# Altium PCB PCB1.PcbDoc
Units mil, origin at the board's own origin, x right, y up, seen from the top; angles counter-clockwise.
Board outline 6702.94 x 3280.03 mil, 2 copper layers (Top Layer, Bottom Layer); 83 components, 130 nets, 342 pads, 0 vias.
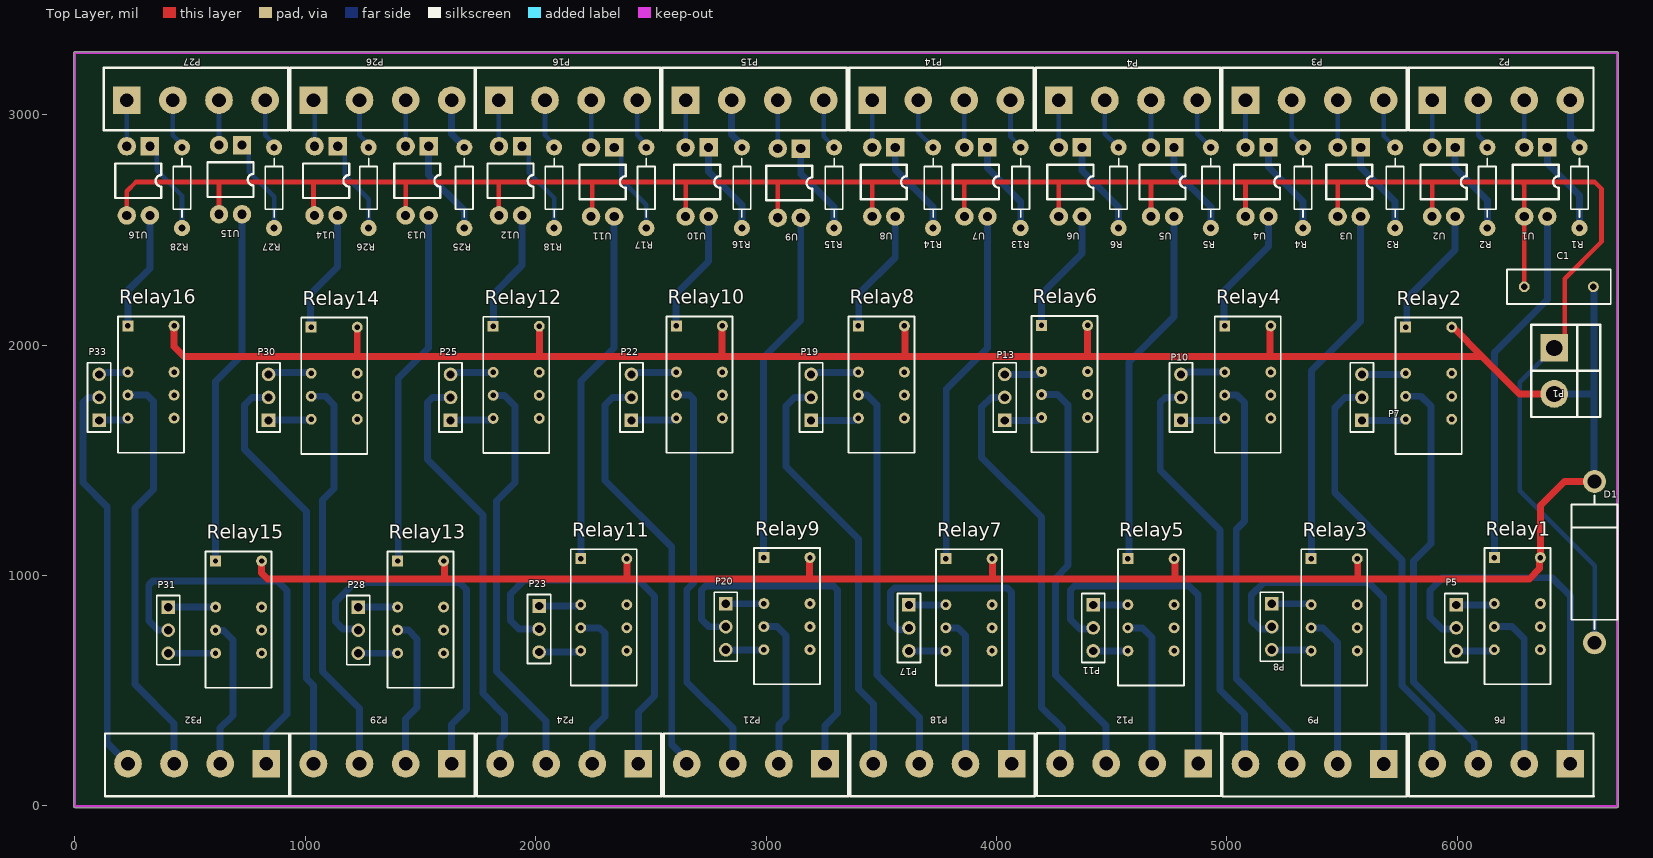
[diagram p0: Top Layer view]
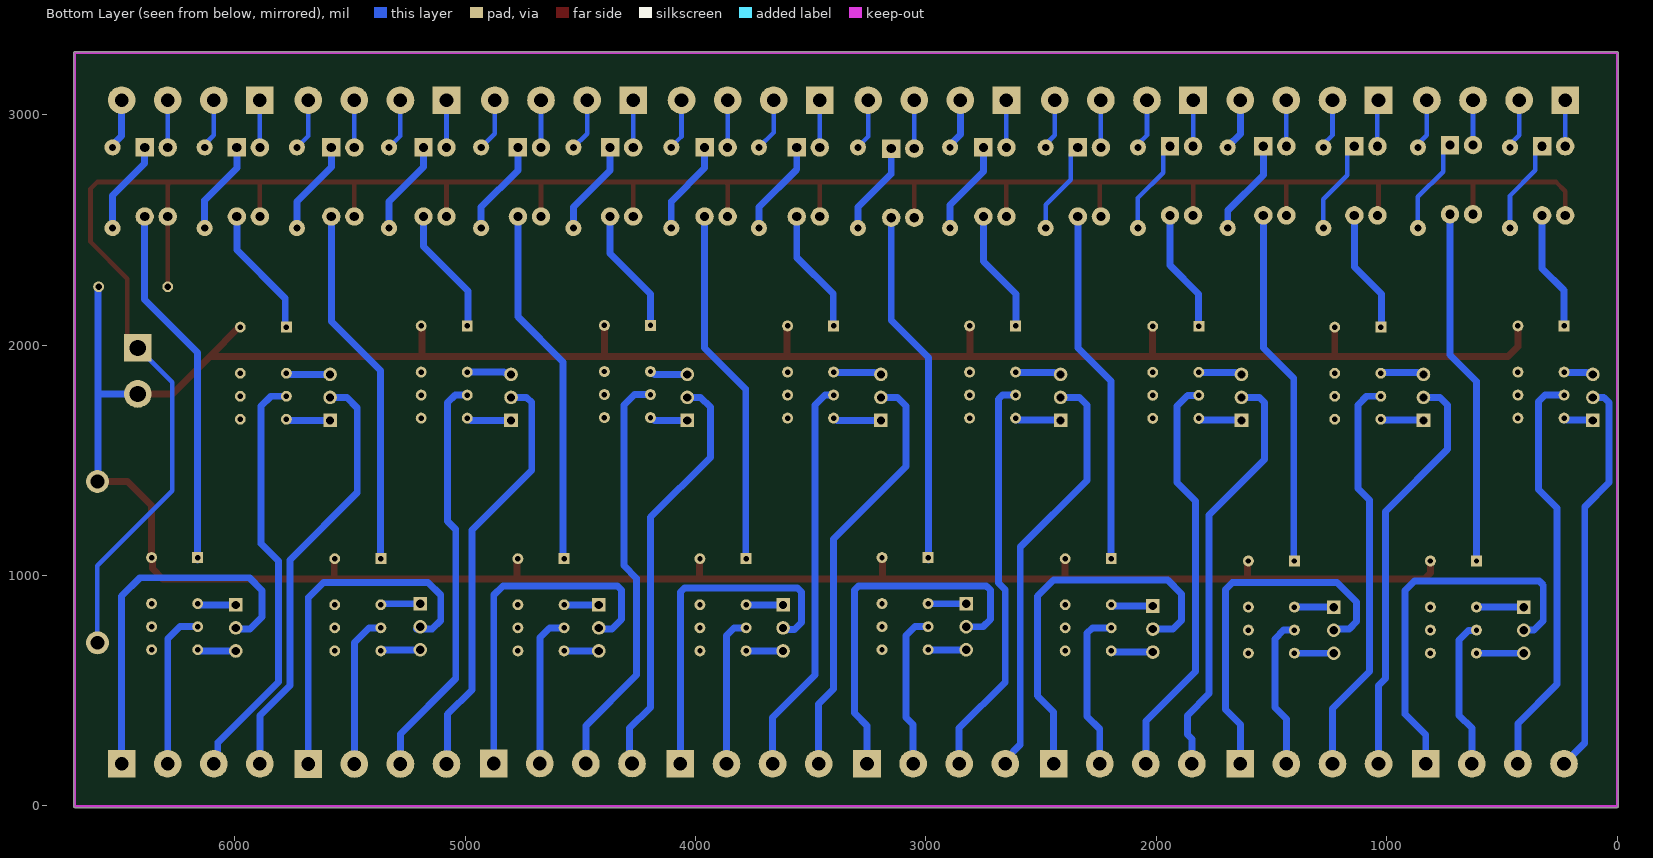
[diagram p1: Bottom Layer view, seen from below]

## Layer stack, top to bottom
Top Solder: solder mask 0.4, Solder Resist, Dk 3.5
Top Layer: signal copper 1.4
Dielectric 1: dielectric 12.6, FR-4, Dk 4.8
Bottom Layer: signal copper 1.4
Bottom Solder: solder mask 0.4, Solder Resist, Dk 3.5

## Board outline
-4.88,-1.14 cw(c0,0) -5.02,0 -5.02,3267.72 cw(c0,3267.72) 0,3272.73 6692.91,3272.73 cw(c6692.91,3267.72) 6697.93,3267.72 6697.93,0 cw(c6692.91,0) 6697.8,-1.14 cw(c6692.91,-2.28) 6697.93,-2.28 cw(c6692.91,-2.28) 6692.91,-7.3 0,-7.3 cw(c0,-2.28)

## Design rules (kind name [scope] priority, off if disabled: settings)
Clearance [All] p1: gap=15 ignorepadtopadclearanceinfootprint=FALSE
PolygonConnect [All] p1: connectstyle=Relief reliefconductorwidth=10 reliefentries=4 polygonreliefangle="90 Angle" airgapwidth=10
RoutingVias [All] p1: holewidth=28 width=50 viastyle="Through Hole" minholewidth=28 minwidth=50 maxholewidth=28 maxwidth=50
SolderMaskExpansion [All] p1: expansion=4 istentingtop=FALSE
Width [All] p1: maxlimit=50 minlimit=10 preferedwidth=20
30 further rules are at their usual default settings.

## Components (designator, comment, footprint, x,y, rotation, side; value= is the part's Value field where it differs from the comment)
C1 "Cap" RAD-0.3 6440.2,2252.72 r0 top value=100pF
D1 "D Zener" DIODE-0.7 6595.2,1057.72 r90 top
P1 "Header 2" CON2 6420.2,1987.72 r270 top
P2 "Header 4" CON4 5890.2,3062.72 r0 top
P3 "Header 4" CON4 5080.2,3062.72 r0 top
P4 "Header 4" CON4 4270.2,3062.72 r0 top
P5 "MHDR1X3" HDR1X3 5994.8,872.28 r270 top
P6 "Header 4" CON4 6490.2,182.72 r180 top
P7 "MHDR1X3" HDR1X3 5585.2,1672.72 r90 top
P8 "MHDR1X3" HDR1X3 5194.17,877.28 r270 top
P9 "Header 4" CON4 5680.2,181.72 r180 top
P10 "MHDR1X3" HDR1X3 4800.2,1672.72 r90 top
P11 "MHDR1X3" HDR1X3 4419.3,872.28 r270 top
P12 "Header 4" CON4 4875.2,183.72 r180 top
P13 "MHDR1X3" HDR1X3 4035.2,1672.72 r90 top
P14 "Header 4" CON4 3460.2,3062.72 r0 top
P15 "Header 4" CON4 2650.2,3062.72 r0 top
P16 "Header 4" CON4 1840.2,3062.72 r0 top
P17 "MHDR1X3" HDR1X3 3619.3,872.28 r270 top
P18 "Header 4" CON4 4065.2,182.72 r180 top
P19 "MHDR1X3" HDR1X3 3195.2,1672.72 r90 top
P20 "MHDR1X3" HDR1X3 2824.8,877.28 r270 top
P21 "Header 4" CON4 3255.2,182.72 r180 top
P22 "MHDR1X3" HDR1X3 2415.2,1672.72 r90 top
P23 "MHDR1X3" HDR1X3 2014.8,867.28 r270 top
P24 "Header 4" CON4 2445.2,182.72 r180 top
P25 "MHDR1X3" HDR1X3 1630.2,1672.72 r90 top
P26 "Header 4" CON4 1035.2,3062.72 r0 top
P27 "Header 4" CON4 225.2,3062.72 r0 top
P28 "MHDR1X3" HDR1X3 1229.8,862.28 r270 top
P29 "Header 4" CON4 1635.2,182.72 r180 top
P30 "MHDR1X3" HDR1X3 840.2,1672.72 r90 top
P31 "MHDR1X3" HDR1X3 404.8,862.28 r270 top
P32 "Header 4" CON4 830.2,182.72 r180 top
P33 "MHDR1X3" HDR1X3 105.2,1672.72 r90 top
R1 "Res3" R1/4W 6529.71,2857.72 r270 top value=1K
R2 "Res3" R1/4W 6129.71,2857.72 r270 top value=1K
R3 "Res3" R1/4W 5729.71,2857.72 r270 top value=1K
R4 "Res3" R1/4W 5329.71,2857.72 r270 top value=1K
R5 "Res3" R1/4W 4929.71,2857.72 r270 top value=1K
R6 "Res3" R1/4W 4529.71,2857.72 r270 top value=1K
R13 "Res3" R1/4W 4104.71,2857.72 r270 top value=1K
R14 "Res3" R1/4W 3724.71,2857.72 r270 top value=1K
R15 "Res3" R1/4W 3294.71,2857.72 r270 top value=1K
R16 "Res3" R1/4W 2894.71,2857.72 r270 top value=1K
R17 "Res3" R1/4W 2479.71,2857.72 r270 top value=1K
R18 "Res3" R1/4W 2079.71,2857.72 r270 top value=1K
R25 "Res3" R1/4W 1689.71,2857.72 r270 top value=1K
R26 "Res3" R1/4W 1274.71,2857.72 r270 top value=1K
R27 "Res3" R1/4W 864.71,2857.72 r270 top value=1K
R28 "Res3" R1/4W 464.71,2857.72 r270 top value=1K
Relay1 "G6S-2" G6S-2 6160.2,1077.72 r0 top
Relay2 "G6S-2" G6S-2 5775.2,2077.72 r0 top
Relay3 "G6S-2" G6S-2 5365.2,1072.72 r0 top
Relay4 "G6S-2" G6S-2 4990.2,2082.72 r0 top
Relay5 "G6S-2" G6S-2 4570.2,1072.72 r0 top
Relay6 "G6S-2" G6S-2 4195,2085 r0 top
Relay7 "G6S-2" G6S-2 3780.2,1072.72 r0 top
Relay8 "G6S-2" G6S-2 3400.2,2082.72 r0 top
Relay9 "G6S-2" G6S-2 2990.2,1077.72 r0 top
Relay10 "G6S-2" G6S-2 2610.2,2082.72 r0 top
Relay11 "G6S-2" G6S-2 2195.2,1072.72 r0 top
Relay12 "G6S-2" G6S-2 1815.2,2081.65 r0 top
Relay13 "G6S-2" G6S-2 1400.2,1062.72 r0 top
Relay14 "G6S-2" G6S-2 1025.2,2077.72 r0 top
Relay15 "G6S-2" G6S-2 610.2,1062.72 r0 top
Relay16 "G6S-2" G6S-2 230.2,2082.72 r0 top
U1 "OPTO" DIP4 6390.2,2857.72 r270 top value=PC817
U2 "OPTO" DIP4 5990.2,2857.72 r270 top value=PC817
U3 "OPTO" DIP4 5580.2,2857.72 r270 top value=PC817
U4 "OPTO" DIP4 5180.2,2857.72 r270 top value=PC817
U5 "OPTO" DIP4 4770.2,2857.72 r270 top value=PC817
U6 "OPTO" DIP4 4370.2,2857.72 r270 top value=PC817
U7 "OPTO" DIP4 3960.2,2857.72 r270 top value=PC817
U8 "OPTO" DIP4 3560.2,2857.72 r270 top value=PC817
U9 "OPTO" DIP4 3150.2,2852.72 r270 top value=PC817
U10 "OPTO" DIP4 2750.2,2857.72 r270 top value=PC817
U11 "OPTO" DIP4 2340.2,2857.72 r270 top value=PC817
U12 "OPTO" DIP4 1940.2,2862.72 r270 top value=PC817
U13 "OPTO" DIP4 1535.2,2862.72 r270 top value=PC817
U14 "OPTO" DIP4 1140.2,2862.72 r270 top value=PC817
U15 "OPTO" DIP4 725.2,2867.72 r270 top value=PC817
U16 "OPTO" DIP4 325.2,2862.72 r270 top value=PC817

## Footprints (in the part's own frame and the unit in brackets; to place one, negate y for a bottom-side part, rotate by r counter-clockwise, add the part's x,y. Pads: shape width x height; smd on the part's side, far side on the other; paste and mask are expansions set on the pad)
CON2 [mil]
  rect 120x120 hole 70: 1(0,0)
  round 120 hole 70: 2(200,0)
  silkscreen extent -100,-100 300,200
CON4 [mil] "CON4 5.08"
  rect 120x120 hole 59.06: 1(0,0)
  round 120 hole 59.06: 2(200,0) 3(400,0) 4(600,0)
  silkscreen extent -101,-131 700,141
DIODE-0.7 [mil] "Diode, Thru-Hole; 2 Leads; 0.7 in Pin Spacing"
  round 100 hole 60: 1(-350,0) 2(350,0)
  silkscreen extent -290,-100 290,100
DIP4 [mil]
  rect 80x80 hole 40: 1(0,0)
  round 80 hole 40: 2(0,-100) 3(300,-100) 4(300,0)
  silkscreen extent 75,-150 225,50
G6S-2 [mm]
  rect 1.2x1.2 hole 0.6: 1(0,0)
  round 1.2 hole 0.6: 2(0,-5.08) 3(0,-7.62) 4(0,-10.16) 5(5.08,-10.16) 6(5.08,-7.62) 7(5.08,-5.08) 8(5.08,0)
  silkscreen extent -1.1,-13.97 6.18,1.05, body extent -1.02,-13.97 6.73,1.02, height 8.55
HDR1X3 [mm] "Connector; Header; 3 Position"
  rect 1.5x1.5 hole 0.9: 1(0,0)
  round 1.5 hole 0.9: 2(2.54,0) 3(5.08,0)
  silkscreen extent -1.27,-1.27 6.35,1.27
R1/4W [mil] "R 1/4W, 2 Pin, 350mil"
  round 70 hole 31: 1(0,0) 2(350,0)
  silkscreen extent 48,-38 302,38, body extent -40,-47 386,47, height 111
RAD-0.3 [mm] "Radial Cap, Thru-Hole; 2 Leads; 0.3 in Pin Spacing"
  round 1.2 hole 0.7: 1(-3.81,0) 2(3.81,0)
  silkscreen extent -5.71,-1.91 5.71,1.91

## Part data
C1: "Capacitor", LatestRevisionDate=17-Jul-2002, LatestRevisionNote="Re-released for DXP Platform.", PackageDescription="Radial Cap, Thru-Hole; 2 Leads; 0.3 in Pin Spacing", PackageReference=RAD-0.3, Published=8-Jun-2000, Publisher="Altium Limited"
D1: "Zener Diode", LatestRevisionDate=17-Jul-2002, LatestRevisionNote="Re-released for DXP Platform.", PackageDescription="Diode, Thru-Hole; 2 Leads; 0.7 in Pin Spacing", PackageReference=DIODE-0.7, Published=8-Jun-2000, Publisher="Altium Limited"
P1: "Header, 2-Pin", LatestRevisionDate=17-Jul-2002, LatestRevisionNote="Re-released for DXP Platform.", Publisher="Altium Limited"
P2 P3 P4 P6 P9 P12 P14 P15 P16 P18 P21 P24 P26 P27 P29 P32: "Header, 4-Pin", LatestRevisionDate=17-Jul-2002, LatestRevisionNote="Re-released for DXP Platform.", Publisher="Altium Limited"
P5 P7 P8 P10 P11 P13 P17 P19 P20 P22 P23 P25 P28 P30 P31 P33: "Header, 3-Pin", LatestRevisionDate=17-Jul-2002, LatestRevisionNote="Re-released for DXP Platform.", Publisher="Altium Limited"
R1 R2 R3 R4 R5 R6 R13 R14 R15 R16 R17 R18 R25 R26 R27 R28: "Resistor", LatestRevisionDate=29-May-2009, LatestRevisionNote="IPC-7351 Footprint Added.", PackageDescription="Chip Resistor", PackageReference=J1-0603, Published=8-Jun-2000, Publisher="Altium Limited"
U1 U2 U3 U4 U5 U6 U7 U8 U9 U10 U11 U12 U13 U14 U15 U16: library part OPTO_PC817

## Nets (pads, with @x,y where several pads share a name; then routed paths per layer and width w, separated by ;. In a path a pad name is that pad's centre, name@x,y a point inside that pad or via, vN(x,y) a via of type N, cw(c..) or ccw(c..) an arc to the next point about the centre after c; other vN are vias at no path point)
GND: C1.1 D1.1 P1.1 U1.3 U2.3 U3.3 U4.3 U5.3 U6.3 U7.3 U8.3 U9.3 U10.3 U11.3 U12.3 U13.3 U14.3 U15.3 U16.3 | length 11340
  Top Layer w20: U16.3 225.2,2667.72 265.2,2707.72 625.2,2707.72 ; U15.3 625.2,2707.72 ; U14.3 1035.2,2567.72 1035.2,2707.72 ; U13.3 1435.2,2707.72 ; U12.3 1840.2,2707.72 ; U11.3 2245.2,2562.72 2245.2,2707.72 ; U10.3 2650.2,2707.72 ; U9.3 3050.2,2702.72 3055.2,2707.72 ; U8.3 3460.2,2707.72 ; U7.3 3860.2,2697.72 3870.2,2707.72 ; U6.3 4270.2,2702.72 4275.2,2707.72 ; U5.3 4670.2,2707.72 ; U4.3 5080.2,2707.72 ; U3.3 5480.2,2707.72 ; U2.3 5890.2,2702.72 5895.2,2707.72 ; C1.1 U1.3 6290.2,2696 6278.48,2707.72 ; P1.1 6465.2,2032.72 6465.2,2287.72 6625.2,2447.72 6625.2,2677.72 6595.2,2707.72 6278.48,2707.72 ; 625.2,2707.72 1035.2,2707.72 ; 1035.2,2707.72 1435.2,2707.72 ; 1435.2,2707.72 1840.2,2707.72 ; 1840.2,2707.72 2245.2,2707.72 ; 2245.2,2707.72 2650.2,2707.72 ; 2650.2,2707.72 3055.2,2707.72 ; 3055.2,2707.72 3460.2,2707.72 ; 3460.2,2707.72 3870.2,2707.72 ; 3870.2,2707.72 4275.2,2707.72 ; 4275.2,2707.72 4670.2,2707.72 ; 4670.2,2707.72 5080.2,2707.72 ; 5080.2,2707.72 5480.2,2707.72 ; 5480.2,2707.72 5895.2,2707.72 ; 5895.2,2707.72 6278.48,2707.72
  Bottom Layer w20: P1.1 6270.2,1837.72 6270.2,1367.72 6595.2,1042.72 D1.1
NetP2_1: P2.1 U2.2 | length 205
  Bottom Layer w20: U2.2 P2.1
NetP2_2: P2.2 R2.1 | length 221.4
  Bottom Layer w20: P2.2 6090.2,2910.13 6129.71,2870.62 R2.1
NetP2_3: P2.3 U1.2 | length 205
  Bottom Layer w20: U1.2 P2.3
NetP2_4: P2.4 R1.1 | length 221.4
  Bottom Layer w30: P2.4 6490.2,2908.05 6529.71,2868.54 R1.1
NetP3_1: P3.1 U4.2 | length 205
  Bottom Layer w20: U4.2 P3.1
NetP3_2: P3.2 R4.1 | length 225.5
  Bottom Layer w20: P3.2 5280.2,2907.23 R4.1
NetP3_3: P3.3 U3.2 | length 205
  Bottom Layer w20: U3.2 P3.3
NetP3_4: P3.4 R3.1 | length 225.5
  Bottom Layer w20: P3.4 5680.2,2907.23 R3.1
NetP4_1: P4.1 U6.2 | length 205
  Bottom Layer w20: U6.2 P4.1
NetP4_2: P4.2 R6.1 | length 229.7
  Bottom Layer w20: P4.2 4470.2,2917.23 R6.1
NetP4_3: P4.3 U5.2 | length 205
  Bottom Layer w20: U5.2 P4.3
NetP4_4: P4.4 R5.1 | length 229.7
  Bottom Layer w20: P4.4 4870.2,2917.23 R5.1
NetP5_1: P5.1 Relay1.2 | length 167.6
  Bottom Layer w30: P5.1 6150.1,872.28 6155.53,877.72 Relay1.2
NetP5_2: P5.2 P6.1 | length 1650
  Bottom Layer w30: P5.2@6000.2,767.72 5932.28,767.72 5880.2,819.8 5880.2,935.2 5935,990 6410,990 6490.2,909.8 P6.1
NetP5_3: P5.3 Relay1.4 | length 167.6
  Bottom Layer w30: P5.3 6150.1,672.28 6155.53,677.72 Relay1.4
NetP6_2: P6.2 Relay1.3 | length 694
  Bottom Layer w30: Relay1.3 6237.28,777.72 6290.2,724.8 P6.2
NetP6_3: P6.3 Relay2.3 | length 1826.9
  Bottom Layer w30: Relay2.3 5842.28,1777.72 5885.2,1734.8 5885.2,1137.72 5810.2,1062.72 5810.2,537.72 6072.98,274.94 6072.98,199.94 P6.3
NetP6_4: P6.4 P7.2 | length 1856.2
  Bottom Layer w30: P7.2 5512.72,1772.72 5467.62,1727.62 5467.62,1360.29 5760.2,1067.72 5760.2,522.72 5890.2,392.72 P6.4
NetP7_1: P7.1 Relay2.4 | length 187.4
  Bottom Layer w30: P7.1 5765.53,1672.72 Relay2.4@5770.53,1677.72
NetP7_3: P7.3 Relay2.2 | length 187.4
  Bottom Layer w30: P7.3 5765.53,1872.72 Relay2.2@5770.53,1877.72
NetP8_1: P8.1 Relay3.2 | length 172.9
  Bottom Layer w30: P8.1 5355.96,877.28 5360.53,872.72 Relay3.2
NetP8_2: P8.2 P9.1 | length 1579.2
  Bottom Layer w30: P8.2@5210.83,767.72 5142.28,767.72 5105.2,804.8 5105.2,915.2 5160,970 5615,970 5680.2,904.8 P9.1
NetP8_3: P8.3 Relay3.4 | length 172.9
  Bottom Layer w30: P8.3 5355.96,677.28 5360.53,672.72 Relay3.4
NetP9_2: P9.2 Relay3.3 | length 669.1
  Bottom Layer w30: Relay3.3 5417.28,772.72 5480.2,709.8 P9.2
NetP9_3: P9.3 Relay4.3 | length 1780.6
  Bottom Layer w30: Relay4.3 5042.28,1782.72 5075.2,1749.8 5075.2,1235.2 5040.2,1200.2 5040.2,552.72 5280.2,312.72 P9.3
NetP9_4: P9.4 P10.2 | length 1821.1
  Bottom Layer w30: P10.2 4732.72,1772.72 4710.2,1750.2 4710.2,1457.72 4970.2,1197.72 4970.2,502.72 5075.2,397.72 5075.2,186.72 P9.4
NetP10_1: P10.1 Relay4.4 | length 189.5
  Bottom Layer w30: P10.1 4975.53,1672.72 Relay4.4@4985.53,1682.72
NetP10_3: P10.3 Relay4.2 | length 194.1
  Bottom Layer w30: P10.3 4805.76,1878.28 4826.3,1878.28 4830.74,1882.72 Relay4.2
NetP11_1: P11.1 Relay5.2 | length 151.1
  Bottom Layer w30: P11.1 4569.76,872.28 Relay5.2
NetP11_2: P11.2 P12.1 | length 1560.6
  Bottom Layer w30: P11.2@4425.7,767.72 4362.28,767.72 4320.2,809.8 4320.2,937.43 4337.77,955 4835,955 4875.2,914.8 P12.1
NetP11_3: P11.3 Relay5.4 | length 151.1
  Bottom Layer w30: P11.3 4569.76,672.28 Relay5.4
NetP12_2: P12.2 Relay5.3 | length 668.9
  Bottom Layer w30: Relay5.3 4632.28,772.72 4675.2,729.8 P12.2
NetP12_3: P12.3 Relay6.3 | length 1803.9
  Bottom Layer w30: Relay6.3 4265,1785 4310.2,1739.8 4310.2,1042.72 4255.2,987.72 4255.2,567.72 4475.2,347.72 P12.3
NetP12_4: P12.4 P13.2 | length 1813.2
  Bottom Layer w30: P13.2 3977.72,1772.72 3935.2,1730.2 3935.2,1512.72 4195.2,1252.72 4195.2,427.72 4285.2,337.72 4285.2,193.72 P12.4
NetP13_1: P13.1 Relay6.4 | length 160.2
  Bottom Layer w30: P13.1 4178.05,1672.72 Relay6.4@4190.33,1685
NetP13_3: P13.3 Relay6.2 | length 160.2
  Bottom Layer w30: P13.3 4178.05,1872.72 Relay6.2@4190.33,1885
NetP14_1: P14.1 U8.2 | length 205
  Bottom Layer w20: U8.2 P14.1
NetP14_2: P14.2 R14.1 | length 231.7
  Bottom Layer w20: P14.2 3660.2,2922.23 R14.1
NetP14_3: P14.3 U7.2 | length 205
  Bottom Layer w20: U7.2 P14.3
NetP14_4: P14.4 R13.1 | length 223.4
  Bottom Layer w20: P14.4 4060.2,2905.13 4104.71,2860.62 R13.1
NetP15_1: P15.1 U10.2 | length 205
  Bottom Layer w20: U10.2 P15.1
NetP15_2: P15.2 R16.1 | length 223.4
  Bottom Layer w30: P15.2 2850.2,2913.05 2894.71,2868.54 R16.1
NetP15_3: P15.3 U9.2 | length 210
  Bottom Layer w20: U9.2 P15.3
NetP15_4: P15.4 R15.1 | length 223.4
  Bottom Layer w20: P15.4 3250.2,2905.13 3294.71,2860.62 R15.1
NetP16_1: P16.1 U12.2 | length 200
  Bottom Layer w20: U12.2 P16.1
NetP16_2: P16.2 R18.1 | length 221.4
  Bottom Layer w20: P16.2 2040.2,2910.13 2079.71,2870.62 R18.1
NetP16_3: P16.3 U11.2 | length 205
  Bottom Layer w20: U11.2 P16.3
NetP16_4: P16.4 R17.1 | length 221.4
  Bottom Layer w20: P16.4 2440.2,2910.13 2479.71,2870.62 R17.1
NetP17_1: P17.1 Relay7.2 | length 161.1
  Bottom Layer w30: P17.1 3779.76,872.28 Relay7.2
NetP17_2: P17.2 P18.1 | length 1515.7
  Bottom Layer w30: P17.2@3625.7,767.72 3622.98,765 3570.2,765 3540.2,795 3540.2,927.43 3557.77,945 4047.62,945 4065.2,927.43 P18.1
NetP17_3: P17.3 Relay7.4 | length 161.1
  Bottom Layer w30: P17.3 3779.76,672.28 Relay7.4
NetP18_2: P18.2 Relay7.3 | length 655.7
  Bottom Layer w30: Relay7.3 3832.28,772.72 3865.2,739.8 P18.2
NetP18_3: P18.3 Relay8.3 | length 1731.5
  Bottom Layer w30: Relay8.3 3437.28,1782.72 3480.2,1739.8 3480.2,567.72 3665.2,382.72 P18.3
NetP18_4: P18.4 P19.2 | length 1835.4
  Bottom Layer w30: P19.2 3122.72,1772.72 3085.2,1735.2 3085.2,1472.72 3400.2,1157.72 3400.2,507.72 3465.2,442.72 P18.4
NetP19_1: P19.1 Relay8.4 | length 204.5
  Bottom Layer w30: P19.1 3385.53,1672.72 Relay8.4@3395.53,1682.72
NetP19_3: P19.3 Relay8.2 | length 207.9
  Bottom Layer w30: P19.3@3197.47,1880 3199.2,1878.28 3221.3,1878.28 3223.02,1880 Relay8.2@3403.9,1880
NetP20_1: P20.1 Relay9.2 | length 165.6
  Bottom Layer w30: P20.1 2989.76,877.28 Relay9.2
NetP20_2: P20.2 P21.1 | length 1627.8
  Bottom Layer w30: P20.2 2752.72,777.28 2720.2,809.8 2720.2,937.43 2737.77,955 3292.62,955 3310.2,937.43 3310.2,402.72 3255.2,347.72 P21.1
NetP20_3: P20.3 Relay9.4 | length 165.6
  Bottom Layer w30: P20.3 2989.76,677.28 Relay9.4
NetP21_2: P21.2 Relay9.3 | length 680.2
  Bottom Layer w30: Relay9.3 3047.28,777.72 3085.2,739.8 3085.2,382.72 3055.2,352.72 P21.2
NetP21_3: P21.3 Relay10.3 | length 1759.8
  Bottom Layer w30: Relay10.3 2667.28,1782.72 2685.2,1764.8 2685.2,967.72 2655.2,937.72 2655.2,537.72 2855.2,337.72 P21.3
NetP21_4: P21.4 P22.2 | length 1832.8
  Bottom Layer w30: P22.2 2333.11,1772.72 2300.2,1739.8 2300.2,1412.72 2590.2,1122.72 2590.2,266.21 2655.2,201.21 P21.4
NetP22_1: P22.1 Relay10.4 | length 197.2
  Bottom Layer w30: P22.1@2415.86,1675 2597.81,1675 2602.23,1679.42 2605.01,1679.42 Relay10.4@2609.43,1675
NetP22_3: P22.3 Relay10.2 | length 200.4
  Bottom Layer w30: P22.3@2403.03,1879.54 2404.29,1878.28 2441.3,1878.28 2443.03,1880 Relay10.2@2602.23,1880
NetP23_1: P23.1 Relay11.2 | length 182.6
  Bottom Layer w30: P23.1 2185.1,867.28 2190.53,872.72 Relay11.2
NetP23_2: P23.2 P24.1 | length 1695.7
  Bottom Layer w30: P23.2@2020.2,767.72 1927.28,767.72 1890.2,804.8 1890.2,920.2 1950,980 2445,980 2515.2,909.8 2515.2,477.72 2445.2,407.72 P24.1
NetP23_3: P23.3 Relay11.4 | length 182.6
  Bottom Layer w30: P23.3 2185.1,667.28 2190.53,672.72 Relay11.4
NetP24_2: P24.2 Relay11.3 | length 704.4
  Bottom Layer w30: Relay11.3 2277.28,772.72 2300.2,749.8 2300.2,387.72 2245.2,332.72 P24.2
NetP24_3: P24.3 Relay12.3 | length 1788.7
  Bottom Layer w30: Relay12.3 1863.35,1781.65 1910.2,1734.8 1910.2,1402.72 1830.2,1322.72 1830.2,582.72 2045.2,367.72 P24.3
NetP24_4: P24.4 P25.2 | length 1823.9
  Bottom Layer w30: P25.2 1552.72,1772.72 1530.2,1750.2 1530.2,1502.72 1770.2,1262.72 1770.2,487.72 1865.2,392.72 1865.2,309.89 1845.2,289.89 P24.4
NetP25_1: P25.1 Relay12.4 | length 188.5
  Bottom Layer w30: P25.1@1630.86,1675 1803.88,1675 1807.23,1678.35 1813.22,1678.35 Relay12.4@1816.57,1675
NetP25_3: P25.3 Relay12.2 | length 190.4
  Bottom Layer w30: P25.3@1618.03,1879.54 1619.29,1878.28 1656.3,1878.28 1658.03,1880 Relay12.2@1807.23,1880
NetP26_1: P26.1 U14.2 | length 202.1
  Bottom Layer w20: P26.1 1040.2,3057.72 U14.2
NetP26_2: P26.2 R26.1 | length 221.4
  Bottom Layer w20: P26.2 1235.2,2910.13 1274.71,2870.62 R26.1
NetP26_3: P26.3 U13.2 | length 200
  Bottom Layer w20: U13.2 P26.3
NetP26_4: P26.4 R25.1 | length 227.6
  Bottom Layer w30: P26.4 1635.2,2916.34 1689.71,2861.83 R25.1
NetP27_1: P27.1 U16.2 | length 200
  Bottom Layer w20: U16.2 P27.1
NetP27_2: P27.2 R28.1 | length 221.4
  Bottom Layer w20: P27.2 425.2,2910.13 464.71,2870.62 R28.1
NetP27_3: P27.3 U15.2 | length 195
  Bottom Layer w20: U15.2 P27.3
NetP27_4: P27.4 R27.1 | length 221.4
  Bottom Layer w20: P27.4 825.2,2910.13 864.71,2870.62 R27.1
NetP28_1: P28.1 Relay13.2 | length 170.6
  Bottom Layer w30: P28.1 1399.76,862.28 Relay13.2
NetP28_2: P28.2 P29.1 | length 1610.3
  Bottom Layer w30: P28.2@1240.2,767.72 1162.28,767.72 1130.2,799.8 1130.2,885.2 1215,970 1670,970 1700.2,939.8 1700.2,417.72 1635.2,352.72 P29.1
NetP28_3: P28.3 Relay13.4 | length 170.6
  Bottom Layer w30: P28.3 1399.76,662.28 Relay13.4
NetP29_2: P29.2 Relay13.3 | length 663.5
  Bottom Layer w30: Relay13.3 1447.28,762.72 1485.2,724.8 1485.2,427.72 1435.2,377.72 P29.2
NetP29_3: P29.3 Relay14.3 | length 1759.8
  Bottom Layer w30: Relay14.3 1087.28,1777.72 1125.2,1739.8 1125.2,1377.72 1075.2,1327.72 1075.2,582.72 1235.2,422.72 P29.3
NetP29_4: P29.4 P30.2 | length 1800.2
  Bottom Layer w30: P30.2 767.72,1772.72 735.2,1740.2 735.2,1547.72 1005.2,1277.72 1005.2,552.72 1035.2,522.72 P29.4
NetP30_1: P30.1 Relay14.4 | length 182.9
  Bottom Layer w30: P30.1@840.86,1675 Relay14.4@1023.72,1675
NetP30_3: P30.3 Relay14.2 | length 190.4
  Bottom Layer w30: P30.3@828.03,1879.54 829.29,1878.28 866.3,1878.28 868.03,1880 Relay14.2@1017.23,1880
NetP31_1: P31.1 Relay15.2 | length 205.6
  Bottom Layer w30: P31.1 609.76,862.28 Relay15.2
NetP31_2: P31.2 P32.1 | length 1668.1
  Bottom Layer w30: P31.2 403.15,763.94 361.06,763.94 320.2,804.8 320.2,957.43 337.77,975 880,975 920.2,934.8 920.2,397.72 830.2,307.72 P32.1
NetP31_3: P31.3 Relay15.4 | length 205.6
  Bottom Layer w30: P31.3 609.76,662.28 Relay15.4
NetP32_2: P32.2 Relay15.3 | length 652.6
  Bottom Layer w30: Relay15.3 612.68,760.24 644.76,760.24 685.2,719.8 685.2,392.72 630.2,337.72 P32.2
NetP32_3: P32.3 Relay16.3 | length 1797.2
  Bottom Layer w30: Relay16.3 312.28,1782.72 340.2,1754.8 340.2,1372.72 260.2,1292.72 260.2,527.72 430.2,357.72 P32.3
NetP32_4: P32.4 P33.2 | length 1727.7
  Bottom Layer w30: P33.2 57.72,1772.72 35,1750 35,1402.72 140.2,1297.52 140.2,272.72 P32.4
NetP33_1: P33.1 Relay16.4 | length 128.7
  Bottom Layer w30: P33.1@105.86,1675 217.81,1675 222.23,1679.42 226.44,1679.42 Relay16.4@230.86,1675
NetP33_3: P33.3 Relay16.2 | length 130.4
  Bottom Layer w30: P33.3@93.03,1879.54 94.29,1878.28 131.3,1878.28 133.02,1880 Relay16.2@222.23,1880
NetR1_2: R1.2 U1.1 | length 407.8
  Bottom Layer w30: U1.1 6390.2,2787.72 6529.71,2648.2 R1.2
NetR2_2: R2.2 U2.1 | length 407.8
  Bottom Layer w30: U2.1 5990.2,2767.72 6129.71,2628.2 R2.2
NetR3_2: R3.2 U3.1 | length 411.9
  Bottom Layer w30: U3.1 5580.2,2772.72 5729.71,2623.2 R3.2
NetR4_2: R4.2 U4.1 | length 411.9
  Bottom Layer w30: U4.1 5180.2,2772.72 5329.71,2623.2 R4.2
NetR5_2: R5.2 U5.1 | length 416.1
  Bottom Layer w30: U5.1 4770.2,2757.72 4929.71,2598.2 R5.2
NetR6_2: R6.2 U6.1 | length 416.1
  Bottom Layer w30: U6.1 4370.2,2757.72 4529.71,2598.2 R6.2
NetR13_2: R13.2 U7.1 | length 409.9
  Bottom Layer w30: U7.1 3960.2,2767.72 4104.71,2623.2 R13.2
NetR14_2: R14.2 U8.1 | length 418.1
  Bottom Layer w30: U8.1 3560.2,2762.72 3724.71,2598.2 R14.2
NetR15_2: R15.2 U9.1 | length 404.9
  Bottom Layer w30: U9.1 3150.2,2742.72 3294.71,2598.2 R15.2
NetR16_2: R16.2 U10.1 | length 409.9
  Bottom Layer w30: U10.1 2750.2,2752.72 2894.71,2608.2 R16.2
NetR17_2: R17.2 U11.1 | length 407.8
  Bottom Layer w20: U11.1 2370.2,2827.72 2370.2,2717.72 2479.71,2608.2 R17.2
NetR18_2: R18.2 U12.1 | length 412.8
  Bottom Layer w20: U12.1 1970.2,2832.72 1970.2,2747.72 2079.71,2638.2 R18.2
NetR25_2: R25.2 U13.1 | length 419
  Bottom Layer w30: U13.1 1535.2,2737.72 1689.71,2583.2 R25.2
NetR26_2: R26.2 U14.1 | length 410.7
  Bottom Layer w20: U14.1 1170.2,2832.72 1170.2,2737.72 1274.71,2633.2 R26.2
NetR27_2: R27.2 U15.1 | length 417.8
  Bottom Layer w20: U15.1 755.2,2837.72 755.2,2752.72 864.71,2643.2 R27.2
NetR28_2: R28.2 U16.1 | length 412.8
  Bottom Layer w20: U16.1 355.2,2832.72 355.2,2757.72 464.71,2648.2 R28.2
NetRELAY1_1: Relay1.1 U1.4 | length 1585.3
  Bottom Layer w30: Relay1.1@6160.2,1067.72 6160.2,1967.72 6390.2,2197.72 U1.4
NetRELAY2_1: Relay2.1 U2.4 | length 567
  Bottom Layer w30: Relay2.1@5780.2,2077.72 5780.2,2202.72 5990.2,2412.72 U2.4
NetRELAY3_1: Relay3.1 U3.4 | length 1578.2
  Bottom Layer w30: Relay3.1@5367.34,1067.72 5367.34,1889.86 5580.2,2102.72 U3.4
NetRELAY4_1: Relay4.1 U4.4 | length 559.9
  Bottom Layer w30: Relay4.1@4987.34,2077.72 4987.34,2234.86 5180.2,2427.72 U4.4
NetRELAY5_1: Relay5.1 U5.4 | length 1571.1
  Bottom Layer w30: Relay5.1@4574.48,1067.72 4574.48,1927 4770.2,2122.72 U5.4
NetRELAY6_1: Relay6.1 U6.4 | length 552.8
  Bottom Layer w30: Relay6.1@4194.48,2077.72 4194.48,2222 4370.2,2397.72 U6.4
NetRELAY7_1: Relay7.1 U7.4 | length 1564
  Bottom Layer w30: Relay7.1@3781.62,1067.72 3781.62,1809.14 3960.2,1987.72 U7.4
NetRELAY8_1: Relay8.1 U8.4 | length 545.7
  Bottom Layer w30: Relay8.1@3401.62,2077.72 3401.62,2222 3560.2,2380.57 U8.4
NetRELAY9_1: Relay9.1 U9.4 | length 1551.9
  Bottom Layer w30: Relay9.1@2988.77,1067.72 2988.77,1946.29 3150.2,2107.72 U9.4
NetRELAY10_1: Relay10.1 U10.4 | length 538.6
  Bottom Layer w30: Relay10.1@2608.77,2077.72 2608.77,2222 2750.2,2363.43 U10.4
NetRELAY11_1: Relay11.1 U11.4 | length 1549.8
  Bottom Layer w30: Relay11.1@2195.91,1067.72 2195.91,1843.43 2340.2,1987.72 U11.4
NetRELAY12_1: Relay12.1 U12.4 | length 536.5
  Bottom Layer w30: Relay12.1@1815.91,2077.72 1815.91,2222 1940.2,2346.29 U12.4
NetRELAY13_1: Relay13.1 U13.4 | length 1549.7
  Bottom Layer w30: Relay13.1@1403.05,1067.72 1403.05,1855.57 1535.2,1987.72 U13.4
NetRELAY14_1: Relay14.1 U14.4 | length 533.5
  Bottom Layer w30: Relay14.1@1023.05,2077.72 1023.05,2222 1140.2,2339.14 U14.4
NetRELAY15_1: Relay15.1 U15.4 | length 1547.6
  Bottom Layer w30: Relay15.1@610.2,1067.72 610.2,1842.72 725.2,1957.72 U15.4
NetRELAY16_1: Relay16.1 U16.4 | length 524.4
  Bottom Layer w30: Relay16.1@230.2,2077.72 230.2,2237.72 325.2,2332.72 U16.4
VCC: C1.2 D1.2 P1.2 Relay1.8 Relay2.8 Relay3.8 Relay4.8 Relay5.8 Relay6.8 Relay7.8 Relay8.8 Relay9.8 Relay10.8 Relay11.8 Relay12.8 Relay13.8 Relay14.8 Relay15.8 Relay16.8 | length 14821.4
  Top Layer w30: Relay16.8@430.2,2077.72 430.2,1992.72 472.7,1950.22 1225.2,1950.22 ; Relay15.8@810.2,1067.72 Relay15.8 810.2,1010 835.2,985 1603.05,985 ; Relay14.8@1223.05,2077.72 1225.2,2075.57 1225.2,1950.22 ; Relay13.8@1603.05,1067.72 1603.05,985 ; Relay12.8@2015.91,2077.72 2015.91,1960.93 2005.2,1950.22 ; Relay11.8@2395.91,1067.72 2395.91,985 ; Relay10.8@2808.77,2077.72 2808.77,1956.64 2815.2,1950.22 ; Relay9.8@3188.77,1067.72 3188.77,985 ; Relay8.8@3601.62,2077.72 3601.62,1951.64 3600.2,1950.22 ; Relay7.8@3981.62,1067.72 3981.62,985 ; Relay6.8@4394.48,2077.72 4394.48,1950.93 4395.2,1950.22 ; Relay5.8@4774.48,1067.72 4774.48,985 ; Relay4.8@5187.34,2077.72 5187.34,1957.36 5180.2,1950.22 ; Relay3.8@5567.34,1067.72 5567.34,985 ; Relay2.8@5980.2,2077.72 6107.7,1950.22 ; P1.2 6270.2,1787.72 6107.7,1950.22 ; D1.2 6465.2,1407.72 6360.2,1302.72 6360.2,1067.72 6356.9,1064.42 6356.9,1029.26 6312.63,985 5567.34,985 ; 1225.2,1950.22 2005.2,1950.22 ; 1603.05,985 2395.91,985 ; 2005.2,1950.22 2815.2,1950.22 ; 2395.91,985 3188.77,985 ; 2815.2,1950.22 3600.2,1950.22 ; 3188.77,985 3981.62,985 ; 3600.2,1950.22 4395.2,1950.22 ; 3981.62,985 4774.48,985 ; 4395.2,1950.22 5180.2,1950.22 ; 4774.48,985 5567.34,985 ; 5180.2,1950.22 6107.7,1950.22
  Bottom Layer w30: P1.2 6587.7,1787.72 6592.7,1792.72 ; C1.2 6592.7,2250.22 6592.7,1792.72 ; D1.2 6592.7,1410.22 6592.7,1792.72
pads on no net: Relay1.5 Relay1.6 Relay1.7 Relay2.5 Relay2.6 Relay2.7 Relay3.5 Relay3.6 Relay3.7 Relay4.5 Relay4.6 Relay4.7 Relay5.5 Relay5.6 Relay5.7 Relay6.5 Relay6.6 Relay6.7 Relay7.5 Relay7.6 Relay7.7 Relay8.5 Relay8.6 Relay8.7 Relay9.5 Relay9.6 Relay9.7 Relay10.5 Relay10.6 Relay10.7 Relay11.5 Relay11.6 Relay11.7 Relay12.5 Relay12.6 Relay12.7 Relay13.5 Relay13.6 Relay13.7 Relay14.5 Relay14.6 Relay14.7 Relay15.5 Relay15.6 Relay15.7 Relay16.5 Relay16.6 Relay16.7

## Keep-outs
Keep-Out Layer:
  lines w10: 0,-2.28 6692.91,-2.28 ; 0,0 0,3267.72 6692.91,3267.72 6692.91,0